# Altium PCB Ticket_Dispancer.PcbDoc (part 3 of 5)
Units mm, origin at the board's own origin, x right, y up, seen from the top; angles counter-clockwise.
Board outline 150.11 x 200.66 mm, 2 copper layers (Top Layer, Bottom Layer); 297 components, 258 nets, 997 pads, 217 vias.
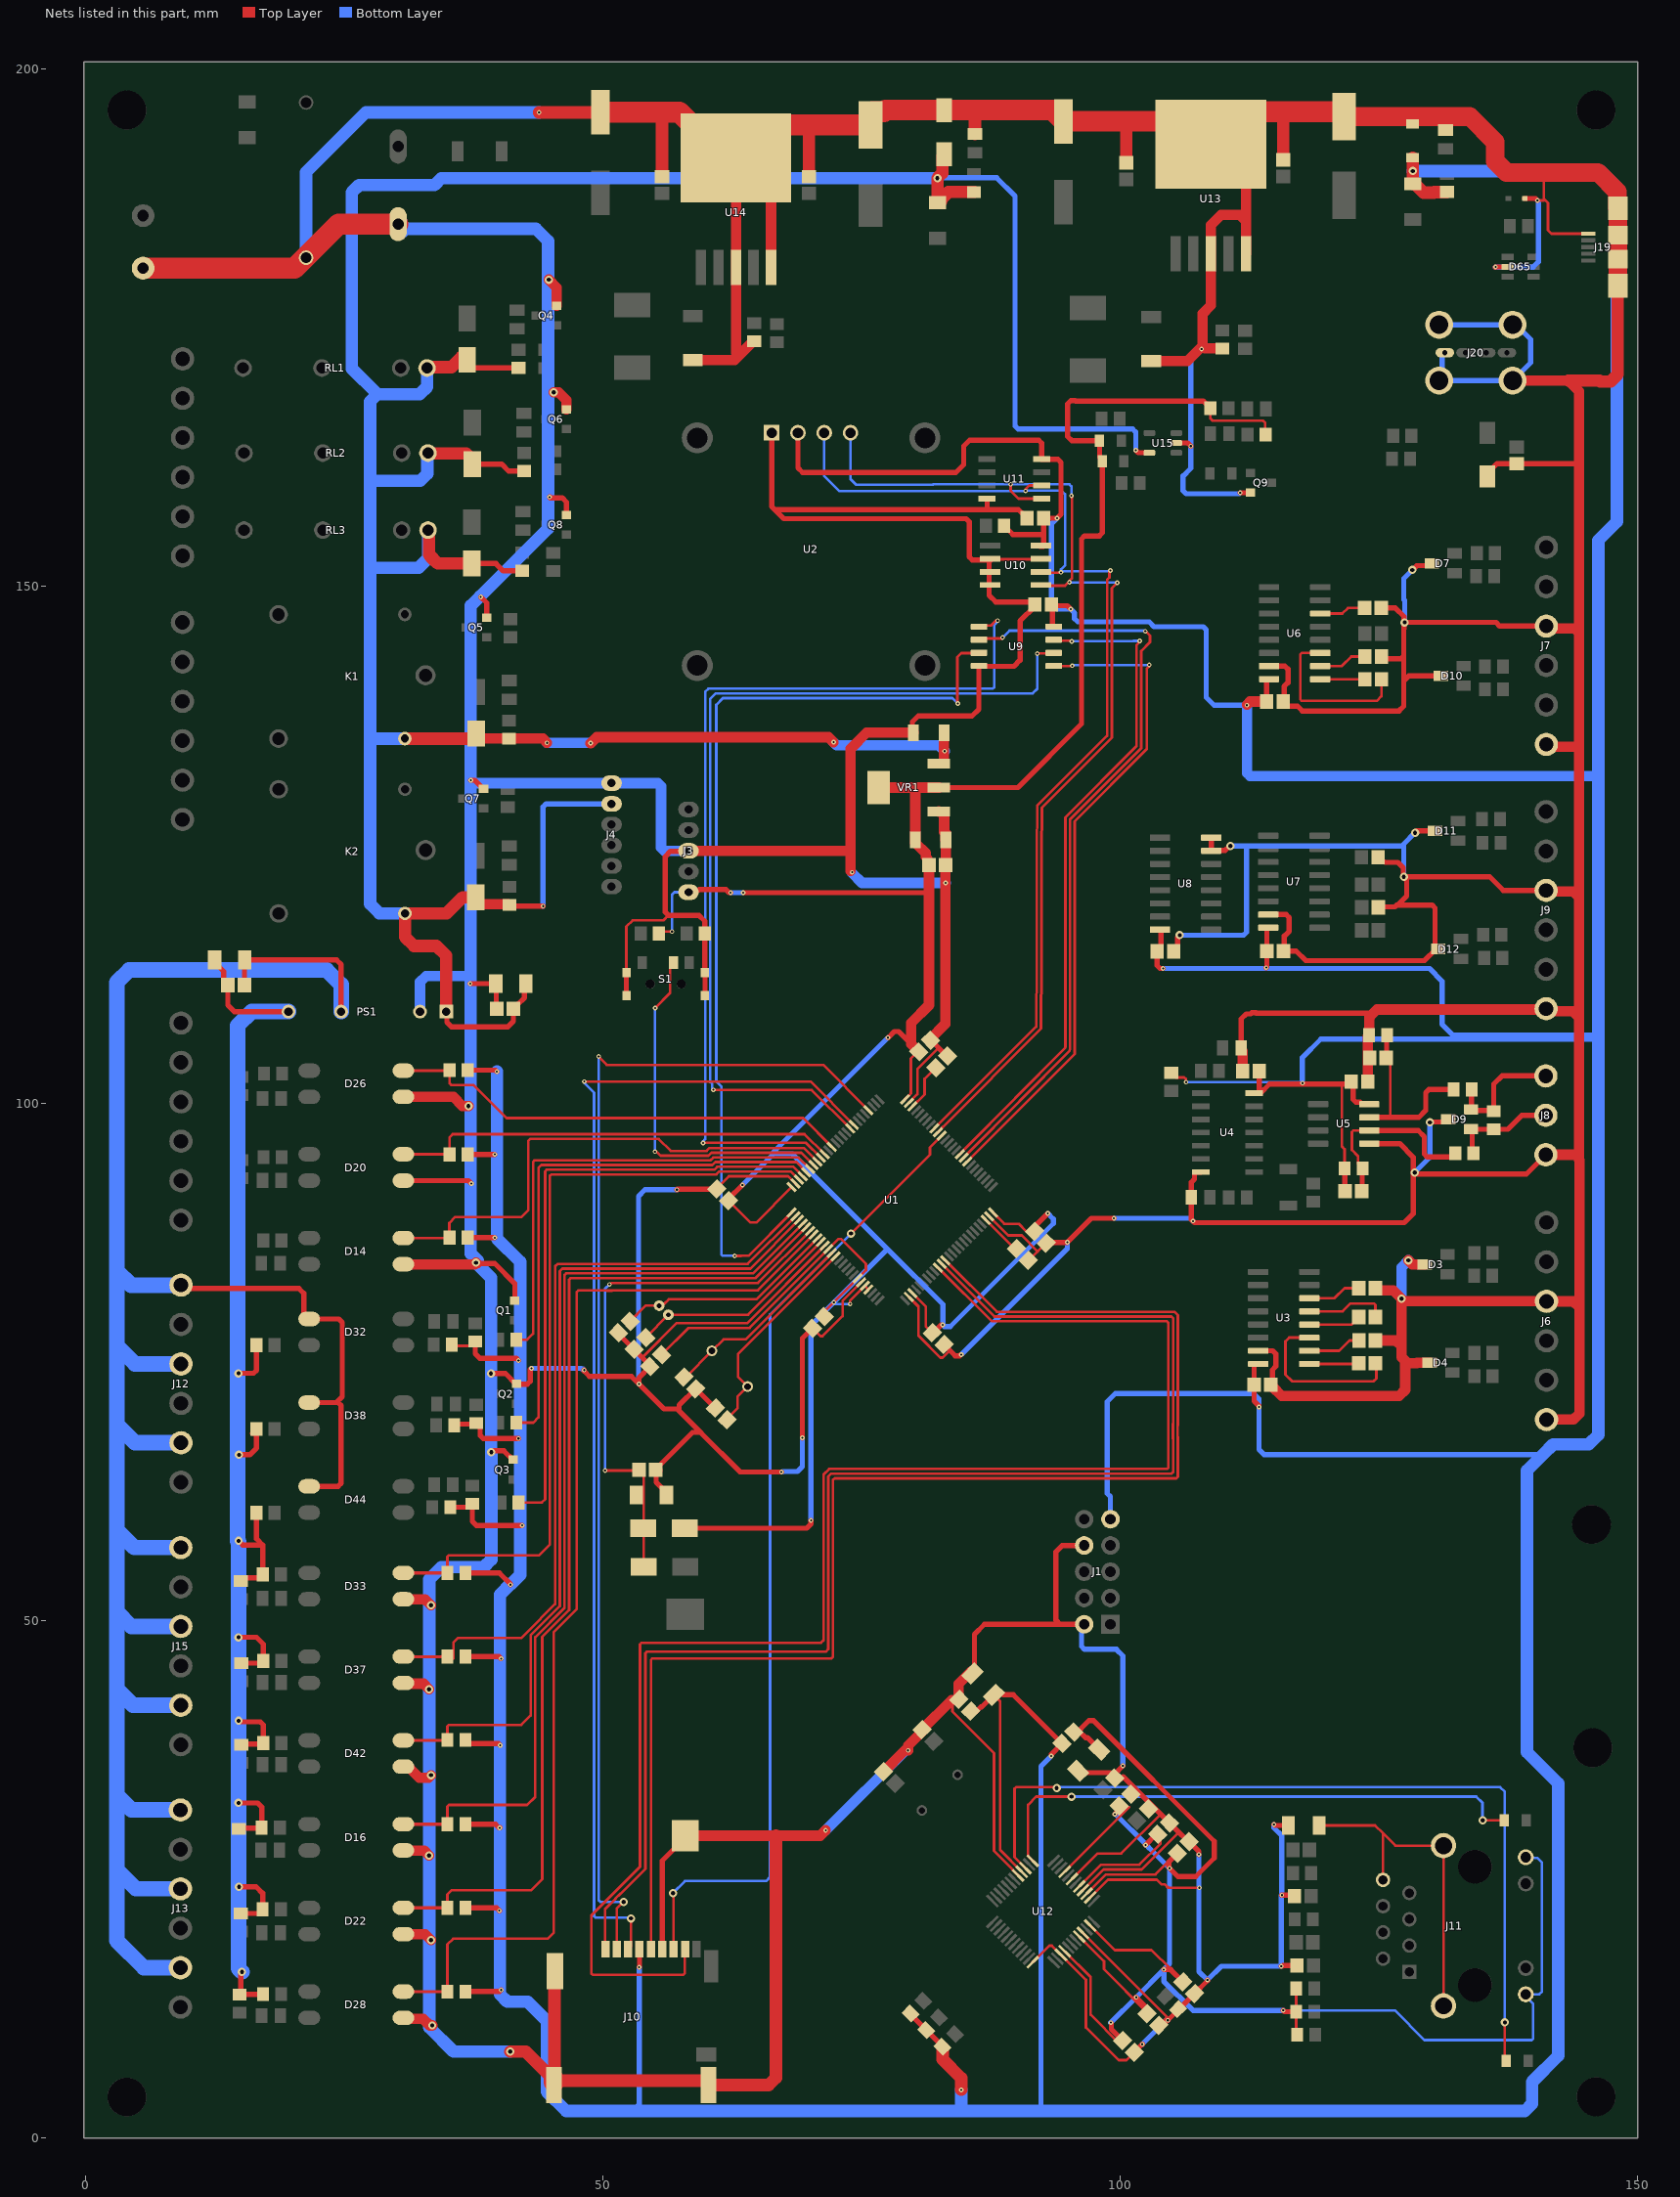
[diagram p2: the nets of this part, all layers, seen from the top]

## Part data (continued)
R93 R96: library part ERJ-PB6B3300V, "RES SMD 330 OHM 0.1% 1/4W 0805", Device Package="0805 (2012 Metric)", manufacturer="Panasonic Electronic Components", Operating Temperature="-55°C ~ 155°C", Power (Watts)="0.25W, 1/4W", Ratings=AEC-Q200, Supplier Device Package=0805, Supplier Part Number 1=P20537CT-ND, Temperature Coefficient=±50ppm/°C, Tolerance=±0.1%, componentlink1description=Datasheet, componentlink1url=https://industrial.panasonic.com/cdbs/www-data/pdf/RDM0000/AOA0000C328.pdf, componentlink2description="DigiKey Link", componentlink2url=https://www.digikey.com/en/products/detail/panasonic-electronic-components/ERJ-PB6B3300V/6213320, Composition="Thick Film", Features="Automotive AEC-Q200, Pulse Withstanding", Height - Seated (Max)="0.028\" (0.70mm)", lastupdated="08-02-2024 9.02.05 PM", Lifecycle Status=Active, Minimum Order=1, Number of Terminations=2, Package / Case="0805 (2012 Metric)", packaging=TapeAndReel, Part Number=ERJ-PB6B3300V, Part Status=Active, partid=35583, price=0.04, Resistance="330 Ohms", series=ERJ-PB6, Size / Dimension="0.079\" L x 0.049\" W (2.00mm x 1.25mm)", Supplier 1=DigiKey
R94: library part KTR10EZPF1651, "RES SMD 1.65K OHM 1% 1/8W 0805", Device Package="0805 (2012 Metric)", manufacturer="Rohm Semiconductor", Operating Temperature="-55°C ~ 155°C", Power (Watts)="0.125W, 1/8W", Ratings=AEC-Q200, Supplier Device Package=0805, Supplier Part Number 1=RHM1.65KAHCT-ND, Temperature Coefficient=±100ppm/°C, Tolerance=±1%, componentlink1description=Datasheet, componentlink1url=https://www.rohm.com/datasheet/KTR03EZPF/ktr-e, componentlink2description="DigiKey Link", componentlink2url=https://www.digikey.com/en/products/detail/rohm-semiconductor/KTR10EZPF1651/4051813, Composition="Thick Film", Features="Automotive AEC-Q200, High Voltage", Height - Seated (Max)="0.026\" (0.65mm)", lastupdated="08-02-2024 9.02.33 PM", Lifecycle Status=Active, Minimum Order=1, Number of Terminations=2, Package / Case="0805 (2012 Metric)", packaging=TapeAndReel, Part Number=KTR10EZPF1651, Part Status=Active, partid=29062, price=0.02, Resistance="1.65 kOhms", series=KTR, Size / Dimension="0.079\" L x 0.049\" W (2.00mm x 1.25mm)", Supplier 1=DigiKey
R97: library part CRCW08053K16FKEA, "RES SMD 3.16K OHM 1% 1/8W 0805", Device Package="0805 (2012 Metric)", manufacturer="Vishay Dale", Operating Temperature="-55°C ~ 155°C", Power (Watts)="0.125W, 1/8W", Ratings=AEC-Q200, Supplier Device Package=0805, Supplier Part Number 1=541-3.16KCCT-ND, Temperature Coefficient=±100ppm/°C, Tolerance=±1%, componentlink1description=Datasheet, componentlink1url=http://www.vishay.com/docs/20035/dcrcwe3.pdf, componentlink2description="DigiKey Link", componentlink2url=https://www.digikey.com/en/products/detail/vishay-dale/CRCW08053K16FKEA/1175692, Composition="Thick Film", Features="Automotive AEC-Q200", Height - Seated (Max)="0.020\" (0.50mm)", lastupdated="08-02-2024 9.02.17 PM", Lifecycle Status=Active, Minimum Order=1, Number of Terminations=2, Package / Case="0805 (2012 Metric)", packaging=TapeAndReel, Part Number=CRCW08053K16FKEA, Part Status=Active, partid=32701, price=0.01, Resistance="3.16 kOhms", series=CRCW, Size / Dimension="0.079\" L x 0.049\" W (2.00mm x 1.25mm)", Supplier 1=DigiKey
R99: library part RNCF0805DTE680R, "RES SMD 680 OHM 0.5% 1/4W 0805", Device Package="0805 (2012 Metric)", manufacturer="Stackpole Electronics Inc", Operating Temperature="-55°C ~ 155°C", Power (Watts)="0.25W, 1/4W", Ratings=AEC-Q200, Supplier Device Package=0805, Supplier Part Number 1=738-RNCF0805DTE680RCT-ND, Temperature Coefficient=±25ppm/°C, Tolerance=±0.5%, componentlink1description=Datasheet, componentlink1url=https://www.seielect.com/catalog/sei-rncf.pdf, componentlink2description="DigiKey Link", componentlink2url=https://www.digikey.com/en/products/detail/stackpole-electronics-inc/RNCF0805DTE680R/6241785, Composition="Thin Film", Features="Automotive AEC-Q200", Height - Seated (Max)="0.026\" (0.65mm)", lastupdated="30-03-2026 8.13.21 PM", Lifecycle Status=Active, Minimum Order=1, Number of Terminations=2, Package / Case="0805 (2012 Metric)", packaging=TapeAndReel, Part Number=RNCF0805DTE680R, Part Status=Active, partid=28010, price=0.01, Resistance="680 Ohms", series=RNCF, Size / Dimension="0.079\" L x 0.049\" W (2.00mm x 1.25mm)", Supplier 1=DigiKey
R100: library part RT0805DRD0710KL, "RES SMD 10K OHM 0.5% 1/8W 0805", Device Package="0805 (2012 Metric)", manufacturer=Yageo, Operating Temperature="-55°C ~ 155°C", Power (Watts)="0.125W, 1/8W", Supplier Device Package=0805, Supplier Part Number 1=311-2699-1-ND, Temperature Coefficient=±25ppm/°C, Tolerance=±0.5%, componentlink1description=Datasheet, componentlink1url=https://www.yageo.com/upload/media/product/productsearch/datasheet/rchip/PYu-RT_1-to-0.01_RoHS_L_11.pdf, componentlink2description="DigiKey Link", componentlink2url=https://www.digikey.com/en/products/detail/yageo/RT0805DRD0710KL/1077814, Composition="Thin Film", Height - Seated (Max)="0.024\" (0.60mm)", lastupdated="30-03-2026 9.20.29 PM", Lifecycle Status=Active, Minimum Order=1, Number of Terminations=2, Package / Case="0805 (2012 Metric)", packaging=TapeAndReel, Part Number=RT0805DRD0710KL, Part Status=Active, partid=27797, price=0.02, Resistance="10 kOhms", series=RT, Size / Dimension="0.079\" L x 0.049\" W (2.00mm x 1.25mm)", Supplier 1=DigiKey
R101 R108: library part RT0805DRD0747KL, "RES SMD 47K OHM 0.5% 1/8W 0805", Device Package="0805 (2012 Metric)", manufacturer=Yageo, Operating Temperature="-55°C ~ 155°C", Power (Watts)="0.125W, 1/8W", Supplier Device Package=0805, Supplier Part Number 1=311-2747-1-ND, Temperature Coefficient=±25ppm/°C, Tolerance=±0.5%, componentlink1description=Datasheet, componentlink1url=https://www.yageo.com/upload/media/product/productsearch/datasheet/rchip/PYu-RT_1-to-0.01_RoHS_L_11.pdf, componentlink2description="DigiKey Link", componentlink2url=https://www.digikey.com/en/products/detail/yageo/RT0805DRD0747KL/1078180, Composition="Thin Film", Height - Seated (Max)="0.024\" (0.60mm)", lastupdated="30-03-2026 9.20.29 PM", Lifecycle Status=Active, Minimum Order=1, Number of Terminations=2, Package / Case="0805 (2012 Metric)", packaging=TapeAndReel, Part Number=RT0805DRD0747KL, Part Status=Active, partid=27804, price=0.02, Resistance="47 kOhms", series=RT, Size / Dimension="0.079\" L x 0.049\" W (2.00mm x 1.25mm)", Supplier 1=DigiKey
R102 R103 R106: library part CSR0805FK1R00, "RES 1 OHM 1% 1/4W 0805", Device Package="0805 (2012 Metric)", manufacturer="Stackpole Electronics Inc", Operating Temperature="-55°C ~ 155°C", Power (Watts)="0.25W, 1/4W", Supplier Device Package=0805, Supplier Part Number 1=CSR0805FK1R00CT-ND, Temperature Coefficient=±200ppm/°C, Tolerance=±1%, componentlink1description=Datasheet, componentlink1url=https://www.seielect.com/catalog/sei-csr_csrn.pdf, componentlink2description="DigiKey Link", componentlink2url=https://www.digikey.com/en/products/detail/stackpole-electronics-inc/CSR0805FK1R00/2217466, Composition="Thick Film", Features="Current Sense", Height - Seated (Max)="0.026\" (0.65mm)", lastupdated="30-03-2026 8.13.19 PM", Lifecycle Status=Active, Minimum Order=1, Number of Terminations=2, Package / Case="0805 (2012 Metric)", packaging=TapeAndReel, Part Number=CSR0805FK1R00, Part Status=Active, partid=28379, price=0.03, Resistance="1 Ohms", series=CSR, Size / Dimension="0.079\" L x 0.049\" W (2.00mm x 1.25mm)", Supplier 1=DigiKey
R104 R105: library part CRGH0805J22R, "RES 22 OHM 5% 1/3W 0805", Device Package="0805 (2012 Metric)", manufacturer="TE Connectivity Passive Product", Operating Temperature="-55°C ~ 155°C", Power (Watts)="0.333W, 1/3W", Ratings=AEC-Q200, Supplier Device Package=0805, Supplier Part Number 1=A126437CT-ND, Temperature Coefficient=±100ppm/°C, Tolerance=±5%, componentlink1description=Datasheet, componentlink1url=https://www.te.com/commerce/DocumentDelivery/DDEController?Action=srchrtrv&DocNm=1773204-1&DocType=DS&DocLang=English, componentlink2description="DigiKey Link", componentlink2url=https://www.digikey.com/en/products/detail/te-connectivity-passive-product/CRGH0805J22R/2385484, Composition="Thick Film", Features="Automotive AEC-Q200", lastupdated="30-03-2026 8.13.21 PM", Lifecycle Status=Active, Minimum Order=1, Number of Terminations=2, Package / Case="0805 (2012 Metric)", packaging=TapeAndReel, Part Number=CRGH0805J22R, Part Status=Active, partid=28124, price=0.01, Resistance="22 Ohms", series="CRGH, Neohm", Size / Dimension="0.079\" L x 0.049\" W (2.00mm x 1.25mm)", Supplier 1=DigiKey
RL1 RL2 RL3: "RELAY GEN PURPOSE SPST 5A 5V", Coil Current="22 mA", Coil Voltage=5VDC, Contact Rating (Current)="5 A", manufacturer="Omron Electronics Inc-EMC Div", Must Operate Voltage="3.5 VDC", Must Release Voltage="0.25 VDC", Operating Temperature="-40°C ~ 90°C", Seal Rating="Sealed - Fully", Supplier Part Number 1=Z5439-ND, Switching Voltage="277VAC, 125VDC - Max", Coil Insulation="Class B", Coil Type="Non Latching", componentlink1description=Datasheet, componentlink1url=https://omronfs.omron.com/en_US/ecb/products/pdf/en-g6dn.pdf, componentlink2description="DigiKey Link", componentlink2url=https://www.digikey.com/en/products/detail/omron-electronics-inc-emc-div/G6DN-1A-DC5/5864613, Contact Form="SPST-NO (1 Form A)", Contact Material="Silver Alloy", lastupdated="16-08-2023 4.45.25 PM", Lifecycle Status=Active, Minimum Order=1, Mounting Type="Through Hole", Operate Time="10 ms", packaging=Tube, Part Number="G6DN-1A DC5", Part Status=Active, price=1.26, Relay Type="General Purpose", Release Time="5 ms", series=G6DN, Supplier 1=DigiKey, Termination Style="PC Pin"
RV1: "470 V 4.5 kA Varistor 1 Circuit Through Hole Disc 14mm", Package="Disc-14 Bourns", Availability="In Stock", Check_prices=https://www.snapeda.com/parts/MOV-14D471K/Bourns/view-part/?ref=eda, MF=Bourns, MP=MOV-14D471K, price=None, Purchase-URL=https://pricing.snapeda.com/search/part/MOV-14D471K/?ref=eda, SnapEDA_Link=https://www.snapeda.com/parts/MOV-14D471K/Bourns/view-part/?ref=snap
U1: "ARMÂ® CortexÂ®-M4 STM32F4 Microcontroller IC 32-Bit Single-Core 180MHz 512KB (512K x 8) FLASH 100-LQFP (14x14)", Package="LQFP-100 STMicroelectronics", Check_prices=https://www.snapeda.com/parts/STM32F446VET6/STMicroelectronics/view-part/?ref=eda, MF=STMicroelectronics, MP=STM32F446VET6, SnapEDA_Link=https://www.snapeda.com/parts/STM32F446VET6/STMicroelectronics/view-part/?ref=snap
U2: "0.96â€ 128 X 64 MONOCHROME GRAPHIC OLED DISPLAY MODULE - I2C", Package=Package, Check_prices=https://www.snapeda.com/parts/DM-OLED096-636/Display+Module/view-part/?ref=eda, MF="Display Module", MP=DM-OLED096-636, SnapEDA_Link=https://www.snapeda.com/parts/DM-OLED096-636/Display+Module/view-part/?ref=snap
U3 U6 U7: "Dual Transmitter/Receiver RS-232 16-Pin SOIC N T/R", Package="SOIC-16 Maxim Integrated", Check_prices=https://www.snapeda.com/parts/MAX3232ESE+T/Analog+Devices/view-part/?ref=eda, MF="Analog Devices", MP=MAX3232ESE+T, SnapEDA_Link=https://www.snapeda.com/parts/MAX3232ESE+T/Analog+Devices/view-part/?ref=snap
U4: "Inverter IC 6 Channel Schmitt Trigger 14-SOIC", Package="SO14-14 Nexperia USA Inc.", Check_prices=https://www.snapeda.com/parts/74HC14D/Toshiba/view-part/?ref=eda, MF=Toshiba, MP=74HC14D, SnapEDA_Link=https://www.snapeda.com/parts/74HC14D/Toshiba/view-part/?ref=snap
U5: "3.3V Powered, Â±15kV ESD-Protected, 12Mbps, Slew-Rate-Limited True RS-485/RS-422 Transceivers", Package="SOIC-8 Maxim", Check_prices=https://www.snapeda.com/parts/MAX3485EESA+/Analog+Devices/view-part/?ref=eda, MF="Analog Devices", MP=MAX3485EESA+, SnapEDA_Link=https://www.snapeda.com/parts/MAX3485EESA+/Analog+Devices/view-part/?ref=snap
U8: "20-V, 4:1, 2-channel general-purpose multiplexer", Package="SOIC-16 Texas Instruments", Check_prices=https://www.snapeda.com/parts/CD4052BMT/Texas+Instruments/view-part/?ref=eda, MF="Texas Instruments", MP=CD4052BMT, SnapEDA_Link=https://www.snapeda.com/parts/CD4052BMT/Texas+Instruments/view-part/?ref=snap
U9: "FLASH - NOR Memory IC 128Mb (16M x 8) SPI - Quad I/O, QPI, DTR 133 MHz 8-SOIC", Package="SOIC-8 Winbond Electronics", Check_prices=https://www.snapeda.com/parts/W25Q128JVSIQ/Winbond/view-part/?ref=eda, MF="Winbond Electronics", MP=W25Q128JVSIQ, SnapEDA_Link=https://www.snapeda.com/parts/W25Q128JVSIQ/Winbond/view-part/?ref=snap
U10: "EEPROM Memory IC 512Kb (64K x 8) IÂ²C 400 kHz 900 ns 8-SOIC", Package="SO-8 Microchip", Check_prices=https://www.snapeda.com/parts/AT24C512C-SSHM-T/Microchip/view-part/?ref=eda, MF=Microchip, MP=AT24C512C-SSHM-T, SnapEDA_Link=https://www.snapeda.com/parts/AT24C512C-SSHM-T/Microchip/view-part/?ref=snap
U11: "Microchip 24AA02E48-I/SN Serial EEPROM Memory,2kb,3500ns,1.7 to 5.5V 8-Pin SOIC", Package="SO-8 Microchip", Check_prices=https://www.snapeda.com/parts/24AA02E48-I/SN/Microchip/view-part/?ref=eda, MF=Microchip, MP=24AA02E48-I/SN, SnapEDA_Link=https://www.snapeda.com/parts/24AA02E48-I/SN/Microchip/view-part/?ref=snap
U12: "Hardwired TCP/IP embedded Ethernet controller", Package=None, Availability=Unavailable, MP=W5500, price=None
U13 U14: "SIMPLE SWITCHERÂ® 4V to 60V, 3A Low Component Count Step-Down Regulator", Package="TO-263-5 Texas Instruments", Check_prices=https://www.snapeda.com/parts/LM2576HVSX-5.0/NOPB/Texas+Instruments/view-part/?ref=eda, MF="Texas Instruments", MP=LM2576HVSX-5.0/NOPB, SnapEDA_Link=https://www.snapeda.com/parts/LM2576HVSX-5.0/NOPB/Texas+Instruments/view-part/?ref=snap
U15: "Power Switch/Driver 1:1 N-Channel 500mA SOT-23-5", Package="SOT-23 STMicroelectronics", Check_prices=https://www.snapeda.com/parts/STMPS2141STR/STMicroelectronics/view-part/?ref=eda, Digi-Key_Part_Number=497-6933-2-ND, MF=STMicroelectronics, MP=STMPS2141STR, Purchase-URL=https://pricing.snapeda.com/search/part/STMPS2141STR/?ref=eda, SnapEDA_Link=https://www.snapeda.com/parts/STMPS2141STR/STMicroelectronics/view-part/?ref=snap
VR1: "800-mA 15-V linear voltage regulator", Package="SOT-223-4 Texas Instruments", Check_prices=https://www.snapeda.com/parts/LM1117IMP-3.3/NOPB/Texas+Instruments/view-part/?ref=eda, MF="Texas Instruments", MP=LM1117IMP-3.3/NOPB, SnapEDA_Link=https://www.snapeda.com/parts/LM1117IMP-3.3/NOPB/Texas+Instruments/view-part/?ref=snap
Y1 Y3: "Crystals 17.1776MHz HC49S", Package="HC-49US ECS Inc.", Check_prices=https://www.snapeda.com/parts/ECS-17.1776-20-4/ECS/view-part/?ref=eda, MF="ECS International", MP=ECS-17.1776-20-4, SnapEDA_Link=https://www.snapeda.com/parts/ECS-17.1776-20-4/ECS/view-part/?ref=snap
Y2: "32.768kHz Â±10ppm Crystal 6pF 35 kOhms Cylindrical Can, Radial", Package="Cylindrical Can Radial  Citizen Finetech Miyota", Availability=Warning, Check_prices=https://www.snapeda.com/parts/CFS-20632768EZBB/Citizen%20Finedevice%20Co%20Ltd/view-part/2815870/?ref=eda, MF="Citizen Finedevice", MP=CFS-20632768EZBB, price=None, Purchase-URL=https://pricing.snapeda.com/search/part/CFS-20632768EZBB/?ref=eda, SnapEDA_Link=https://www.snapeda.com/parts/CFS-20632768EZBB/Citizen%20Finedevice%20Co%20Ltd/view-part/2815870/?ref=snap

## Via types
v1: diameter 0.45, hole 0.2, Top Layer to Bottom Layer, 169 vias
v2: diameter 0.8, hole 0.4, Top Layer to Bottom Layer, 48 vias

## Nets (pads, with @x,y where several pads share a name; then routed paths per layer and width w, separated by ;. In a path a pad name is that pad's centre, name@x,y a point inside that pad or via, vN(x,y) a via of type N, cw(c..) or ccw(c..) an arc to the next point about the centre after c; other vN are vias at no path point)
3v3: C17.2 C22.2 C23.2 C24.2 C25.2 C31.1 C32.2 C37.2 C38.2 C39.2 C40.2 D57.1 F2.2 FB1.1 J1.9 J10.4 R8.2 R13.2 R27.1 R28.1 R29.1 R35.1 R36.2 R39.2 R44.2 R47.2 R52.2 R55.2 R60.2 R63.1 R65.1 R67.2 R72.1 R74.2 R75.1 R80.1 R81.1 R93.1 U2.2 U3.16 U4.14 U5.8 U6.16 U7.16 U8.16 U9.8 U10.8 U11.8 U12.28 | length 890.4
  Top Layer w0.254: R63.1@35.52,76.87 35.831,76.559 37.68,76.559 R65.1@37.921,76.559 ; C39.2@87.785,42.845 87.785,42.82 88.397,42.208 88.397,27.831 U12.28@90.488,25.74 ; R8.2@104.94,102.955 105.388,102.507 106.191,102.507 106.34,102.358 106.34,102.08 v1(106.36,102.06) ; 121.43,101.87 121.43,95.818 121.68,95.568 R13.2@121.68,93.72
  Top Layer w0.5: R72.1@35.651,68.885 35.766,69 37.94,69 38.15,68.79 38.15,67.903 38.443,67.61 v1(41.86,67.61) ; R80.1@35.776,60.97 37.357,60.97 R81.1@37.389,61.002 ; R55.2@36.73,14.16 40.02,14.16 v1(40.18,14.32) ; R47.2@36.73,22.252 39.738,22.252 v1(40.01,21.98) ; R39.2@36.73,30.331 39.629,30.331 39.97,29.99 v1(40.05,29.99) ; R74.2@36.73,38.48 36.73,38.46 37.055,38.135 39.915,38.135 v1(40.08,37.97) ; R67.2@36.73,46.548 39.962,46.548 v1(40.17,46.34) ; R60.2@36.73,54.61 40.02,54.61 41.07,53.56 v1(41.07,53.48) ; R36.2@36.95,87.02 v1(39.56,87.02) ; R44.2@36.95,95.05 39.54,95.05 v1(39.56,95.07) ; R52.2@36.95,103.22 39.63,103.22 v1(39.77,103.08) ; R81.1@37.06,61.33 37.717,61.33 37.538,61.151 R81.1@37.389,61.002 ; R81.1@37.389,61.3 R81.1@37.389,61.002 ; R65.1@37.68,76.99 37.68,76.559 37.68,75.81 38.12,75.37 41.63,75.37 v1(41.86,75.14) ; v1(42.22,59.21) 37.79,59.21 37.389,59.611 R81.1@37.389,61.002 ; v1(53.52,16.52) 53.55,16.55 J10.4@53.55,18.27 ; U2.2@68.86,164.82 68.86,161.42 69.31,160.97 84.12,160.97 84.88,161.73 84.88,163.53 85.44,164.09 92.129,164.09 92.422,163.797 U11.8@92.422,162.259 93.971,162.259 94.28,161.95 94.28,156.93 v1(93.9,156.55) 93.891,156.559 C37.2@92.6,156.559 92.6,155.19 ; R29.1@79.738,12.034 79.738,11.964 82.811,8.891 R27.1@82.811,8.821 ; C40.2@85.52,41.22 86.086,41.22 86.539,41.673 86.624,41.673 C39.2@87.38,42.429 ; C39.2@87.785,42.845 87.962,43.021 88.528,43.021 88.705,42.845 89.675,42.845 FB1.1@94.39,38.13 93.34,37.08 v1(93.34,36.92) ; R35.1@88.78,155.83 88.78,155.73 89.105,155.405 89.205,155.405 89.64,154.97 92.38,154.97 92.6,155.19 ; U10.8@92.254,153.85 92.571,153.85 92.6,153.88 92.6,155.19 ; U9.8@93.545,146.052 93.492,146.052 93.452,146.092 93.452,148.003 93.36,148.095 94.89,148.095 v1(95.219,147.767) ; C31.1@103.56,114.69 103.56,113.323 103.853,113.031 v1(104.139,113.031) ; U8.16@103.85,116.79 103.88,116.79 103.93,116.74 C31.1@103.93,114.73 ; U4.14@112.964,100.987 U4.14@113.423,100.987 ; U3.16@113.33,74.819 112.985,74.819 112.94,74.774 C17.2@112.94,72.8 112.94,71.24 113.41,70.77 v1(113.41,70.67) ; C22.2@113.44,103.13 113.44,101.004 U4.14@113.423,100.987 ; v1(114.11,113.12) 114.17,113.18 C32.2@114.17,114.72 114.17,116.935 114.215,116.98 U7.16@114.31,116.98 ; C25.2@114.15,138.84 114.15,140.95 114.195,140.995 U6.16@114.385,140.995 ; R13.2@121.68,93.72 121.705,93.695 121.705,91.541 C24.2@121.73,91.516 ; U5.8@124.075,99.921 123.385,99.921 123.196,100.11 122.793,100.11 122.5,100.403 122.5,101.94 C23.2@122.33,102.11 122.09,101.87 121.43,101.87 114.431,101.87 113.548,100.987 U4.14@113.423,100.987
  Top Layer w1: v1@112.25,138.547 112.543,138.84 C25.2@114.15,138.84
  Top Layer w1.2: R27.1@82.847,8.751 82.847,7.603 84.65,5.8 v1(84.65,4.664) ; D57.1@128.27,191.405 v2(128.27,190.11) F2.2@128.27,188.87 128.47,188.87 129.32,188.02 130.314,188.02 130.356,188.062 131.547,188.062 R93.1@131.572,188.087
  Bottom Layer w0.254: v1(106.36,102.06) 117.51,102.06 v1(117.61,101.96)
  Bottom Layer w0.5: 52.89,2.63 53.52,3.26 v1(53.52,16.52) ; 92.34,2.63 92.34,35.92 v1(93.34,36.92) ; v1(93.9,156.55) 93.35,156 93.35,148.31 93.893,147.767 v1(95.219,147.767) 95.59,147.395 95.59,146.85 95.91,146.53 102.804,146.53 103.274,146.06 108.027,146.06 108.32,145.767 108.32,139.24 109.08,138.48 v1(112.25,138.48) ; J1.9@99.06,59.817 99.06,62 98.75,62.31 98.75,71.17 99.54,71.96 112.88,71.96 113.41,71.43 v1(113.41,70.67) 113.41,66.54 113.885,66.065 140.855,66.065 ; v1(104.139,113.031) 129.89,113.031 131.1,111.82 131.1,107.65 132.17,106.58 145.83,106.58 146.2,106.21 119.39,106.21 117.61,104.43 v1(117.61,101.96) ; 112.25,131.913 112.543,131.62 ; 146.041,131.62 146.2,131.779
  Bottom Layer w1: 112.25,131.913 v1(112.25,138.48) ; 112.543,131.62 146.041,131.62
  Bottom Layer w1.2: v1(39.77,103.08) 39.77,86.94 42.02,84.69 42.02,54.43 v1(41.07,53.48) 41.01,53.48 40.07,52.54 40.07,13.883 40.773,13.18 42.74,13.18 44.6,11.32 44.6,4.49 46.46,2.63 52.89,2.63 84.506,2.63 ; v1(84.65,4.664) 84.65,2.774 84.506,2.63 ; v2(128.27,190.11) 146.42,190.11 148,188.53 148,156.22 146.2,154.42 146.2,131.779 146.2,106.21 146.2,67.97 145.27,67.04 141.83,67.04 140.855,66.065 139.31,64.52 139.31,37.305 142.34,34.275 142.34,7.96 139.81,5.43 139.81,3.333 139.107,2.63 92.34,2.63 84.506,2.63
5v: C57.2 C58.2 C70.2 D47.2 D49.2 D51.2 D53.2 D55.2 D60.C F3.2 J4.5 K1.COIL1 K2.COIL1 PS1.1 R83.2 R84.2 R86.2 R88.2 R90.2 R96.1 RL1.1 RL2.1 RL3.1 U15.5 VR1.3 | length 357.5
  Top Layer w0.5: 33.112,152.578 33.512,152.178 34.06,152.178 ; PS1.1@34.876,108.87 34.93,108.816 34.93,107.84 35.37,107.4 40.83,107.4 41.36,107.93 41.36,109.2 41.76,109.6 41.81,109.6 42.432,110.222 42.432,111.446 C58.2@42.565,111.579 ; 35.98,119.92 36.46,119.92 ; D47.2@36.621,172.14 D47.2@36.898,171.863 36.898,171.69 37.498,171.09 R83.2@41.86,171.09 ; D55.2@37.338,152.178 39.675,152.178 40.383,151.47 R90.2@42.22,151.47 ; D51.2@37.4,162.19 D51.2@37.4,161.79 40.23,161.79 40.905,161.115 R86.2@42.41,161.115 ; R88.2@40.99,119.175 41.105,119.06 v1(44.23,119.06) ; VR1.3@82.468,132.825 82.75,132.825 VR1.3@82.975,133.05 ; v1(101.5,163.13) 101.75,162.88 U15.5@102.84,162.88
  Top Layer w1: D53.2@37.719,119.92 37.719,119.6 38.069,119.25 R88.2@40.815,119.25 ; D49.2@37.772,135.763 38.28,135.255 R84.2@40.947,135.255 44.205,135.255 v1(44.61,134.85) ; v1(48.83,134.81) 49.41,135.39 71.82,135.39 v1(72.3,134.91) ; VR1.3@82.975,133.05 C70.2@82.975,135.83
  Top Layer w1.2: K1.COIL1@30.872,135.255 37.264,135.255 D49.2@37.472,135.463 ; RL1.1@33.02,171.069 33.116,171.165 35.385,171.165 D47.2@36.36,172.14 ; RL3.1@33.112,155.408 33.207,155.312 33.207,153.031 34.06,152.178 D55.2@37.338,152.178 ; RL2.1@33.147,162.814 36.776,162.814 D51.2@37.4,162.19 ; PS1.1@34.876,108.87 34.876,114.261 33.917,115.22 31.76,115.22 30.901,116.079 30.901,118.339 K2.COIL1@30.88,118.36 34.9,118.36 36.46,119.92 D53.2@37.719,119.92 ; D60.C@82.99,191.72 82.815,191.545 82.815,189.9 v2(82.338,189.423) F3.2@82.338,187.058 82.538,187.058 82.702,187.222 82.702,187.377 83.405,188.08 R96.1@85.88,188.08
  Bottom Layer w0.5: v1(44.23,119.06) 44.23,128.657 44.523,128.95 J4.5@50.85,128.95 ; v1@48.79,134.85 v1(48.83,134.81) ; v2(82.338,189.423) 82.375,189.46 88.06,189.46 89.84,187.68 89.84,165.473 90.133,165.18 101.207,165.18 101.5,164.887 v1(101.5,163.13)
  Bottom Layer w1: v1(44.61,134.85) v1@48.79,134.85 ; v1(72.3,134.91) 72.62,134.59 82.49,134.59 v1(83.04,134.04)
  Bottom Layer w1.2: K1.COIL1@30.872,135.255 27.625,135.255 27.52,135.15 ; K2.COIL1@30.88,118.36 30.876,118.364 28.426,118.364 27.52,119.27 27.52,135.15 ; RL1.1@33.02,171.069 33.02,169.243 32.317,168.54 28.223,168.54 ; RL3.1@33.112,155.408 33.112,152.662 32.22,151.77 27.52,151.77 ; RL2.1@33.147,162.814 33.051,162.718 33.051,160.863 32.348,160.16 27.67,160.16 27.52,160.31 ; v2(82.338,189.423) 34.403,189.423 33.74,188.76 26.453,188.76 25.75,188.057 25.75,171.013 28.223,168.54 ; 27.52,135.15 27.52,151.77 ; 27.52,151.77 27.52,160.31 ; 27.52,160.31 27.52,167.837 28.223,168.54
A: D9.1 J8.2 R14.2 R18.2 | length 10.2
  Top Layer w0.5: R14.2@134.134,95.171 134.012,95.293 134.012,97.378 D9.1@133.89,97.5 R18.2@136.094,97.501 ; R18.2@136.094,97.501 137.471,97.501 138.82,98.85 J8.2@141.13,98.85
A3v3: C41.2 C42.2 C43.2 C44.2 C45.2 C46.2 C47.2 FB1.2 J11.9 J11.12 R24.2 R25.2 R26.2 U12.4 U12.8 U12.11 U12.15 U12.17 U12.21 | length 190.2
  Top Layer w0.254: U12.4@94.632,18.06 U12.4@94.632,18.06 97.146,15.544 97.146,11.914 C41.2@99.95,9.11 ; U12.21@94.632,25.74 100.869,31.976 ; U12.8@96.046,19.475 98.43,17.091 98.43,16.319 102.604,12.144 C44.2@102.604,12.036 C44.2@102.604,12.546 ; U12.17@96.046,24.325 98.144,26.423 101.843,26.423 103.905,28.485 C46.2@103.905,29.089 ; U12.15@96.753,23.618 98.615,25.48 103.413,25.48 104.682,26.748 ; U12.11@97.107,20.535 99.472,18.17 103.03,18.17 104.895,16.305 ; v1(99.09,11.16) v1@99.15,11.1 ; C42.2@100.304,32.114 C42.2@100.557,32.114 ; C43.2@105.544,15.106 C43.2@106.064,15.106 ; R26.2@117.014,14.45 R24.2@117.014,12.218 117.014,10.066 R25.2@117.094,9.986
  Top Layer w0.5: FB1.2@95.521,39.261 96.087,39.261 96.646,38.702 96.819,38.702 C47.2@97.985,37.535 ; FB1.2@95.592,38.952 96.998,40.358 97.412,40.358 109.09,28.68 109.09,27.07 107.3,25.28 105.57,25.28 v1(104.77,26.08) ; v1@99.15,11.1 99.15,10.51 C41.2@100.234,9.426 ; v1(99.49,31.3) C42.2@100.304,32.114 ; v1(101.54,13.61) C44.2@102.604,12.546 ; v1(102.442,28.321) 103.463,29.342 C46.2@103.617,29.342 ; v1(104.22,16.29) 104.88,16.29 C43.2@106.064,15.106 ; v1@104.71,26.193 104.71,26.72 C45.2@105.52,27.53 ; v1(115.75,12.34) 115.872,12.218 R24.2@117.014,12.218
  Bottom Layer w0.254: v1(99.49,31.3) v1@99.55,31.3 ; v1(115.75,12.34) 126.53,12.34 129.39,9.48 139.761,9.48 139.91,9.629 139.91,12.99 139.192,13.708 J11.9@139.192,13.893 140.493,13.893 140.76,14.16 140.76,26.64 140.338,27.062 139.273,27.062 J11.12@139.192,27.143
  Bottom Layer w0.5: v1(99.09,11.16) v1(101.54,13.61) v1(104.22,16.29) ; v1@99.55,31.3 102.485,28.365 102.73,28.12 102.73,28.06 102.79,28.06 v1(104.77,26.08) 104.77,16.84 v1(104.22,16.29) ; v1(115.75,12.34) 107.04,12.34 104.22,15.16 v1(104.22,16.29)
AA: C24.1 R13.1 R14.1 U5.6 | length 18.4
  Top Layer w0.254: R13.1@123.43,93.72 122.982,94.168 122.982,94.908 122.389,95.5 122.389,97.232 122.538,97.381 U5.6@124.075,97.381
  Top Layer w0.5: C24.1@123.33,91.516 123.38,91.566 123.38,93.67 R13.1@123.43,93.72 ; U5.6@124.075,97.381 128.799,97.381 129.39,96.79 129.39,95.113 129.683,94.82 132.059,94.82 132.384,95.145 R14.1@132.384,95.171
ACTLED: R33.1 U12.27 | length 81.9
  Top Layer w0.254: U12.27@90.842,26.093 89.798,27.137 89.798,33.771 89.947,33.92 93.77,33.92 v2(93.86,33.83) ; v2(137.17,11.18) 137.17,7.6 R33.1@137.31,7.46
  Bottom Layer w0.254: v2(93.86,33.83) 93.95,33.92 136.722,33.92 137.17,33.472 v2(137.17,11.18)
B: D9.2 J8.1 R18.1 R19.2 | length 12.2
  Top Layer w0.5: R19.2@133.974,101.341 133.932,101.299 133.932,99.442 D9.2@133.89,99.4 133.965,99.325 136.02,99.325 R18.1@136.094,99.251 136.094,101.864 136.89,102.66 J8.1@141.13,102.66
BB: C26.1 R16.1 R19.1 U5.7 | length 18.7
  Top Layer w0.254: C26.1@125.71,104.381 126.09,104.001 126.09,98.786 126.239,98.637 126.449,98.637 126.463,98.651
  Top Layer w0.5: U5.7@124.075,98.651 126.463,98.651 128.851,98.651 129.52,99.32 129.52,101.048 129.813,101.341 R19.1@132.224,101.341 ; C26.1@125.71,104.381 125.752,104.423 125.752,106.544 R16.1@125.794,106.586
BOOT: S1.2 U1.94 | length 35.1
  Top Layer w0.254: v1(55.04,95.34) 55.188,95.34 55.578,94.95 60.212,94.95 60.492,95.23 69.183,95.23 U1.94@70.377,94.037 ; v1(55.06,109.22) 56.507,110.667 56.507,113.283 S1.2@56.83,113.606
  Bottom Layer w0.254: v1(55.04,95.34) 55.05,95.35 55.05,109.21 v1(55.06,109.22)
CGND: C56.2 J11.8 J11.15 J11.16 | length 32.8
  Top Layer w0.254: C56.2@119.215,30.21 124.63,30.21 125.402,29.438 ; J11.8@125.402,24.958 125.402,29.438 ; J11.15@131.242,12.773 J11.16@131.242,28.263 126.577,28.263 125.402,29.438
CLK: J10.5 U1.37 | length 136.5
  Top Layer w0.254: J10.5@54.65,18.27 54.65,46.203 54.799,46.352 72.099,46.352 72.248,46.501 72.248,63.611 72.397,63.76 105.419,63.76 105.568,63.909 105.568,67.77 105.55,67.788 105.55,68.842 105.568,68.86 105.568,79.532 105.238,79.862 88.087,79.862 U1.37@83.105,84.844
CMD: J10.3 U1.83 | length 115.6
  Top Layer w0.254: v1(48.21,102.11) 70.082,102.11 U1.83@74.266,97.926 ; J10.3@52.45,18.27 52.723,18.543 52.723,19.957 52.73,19.964 v2(52.73,21.23)
  Bottom Layer w0.254: v1(48.21,102.11) 48.21,101.991 49.16,101.041 49.16,21.459 49.309,21.31 52.65,21.31 v2(52.73,21.23)
D0: J10.7 U1.65 | length 94.2
  Top Layer w0.254: J10.7@56.85,18.27 v2@56.85,23.914 ; v2(73.99,87.43) 81.614,95.054 81.614,95.729 U1.65@82.751,96.865
  Bottom Layer w0.254: v2(56.78,23.67) 57.95,24.84 65.781,24.84 66.17,25.229 66.17,79.61 v2(73.99,87.43)
D1: J10.8 U1.35 | length 150.9
  Top Layer w0.254: J10.8@57.92,17.99 57.92,15.919 57.771,15.77 57.53,15.77 49.169,15.77 49.049,15.77 48.9,15.919 48.9,21.52 53.6,26.22 53.6,47.717 53.749,47.866 71.079,47.866 71.34,48.127 71.34,64.136 71.872,64.668 104.511,64.668 104.66,64.817 104.66,67.394 104.642,67.412 104.642,69.218 104.66,69.236 104.66,78.76 104.466,78.954 87.581,78.954 U1.35@82.397,84.137
D2: J10.1 U1.36 | length 138
  Top Layer w0.254: J10.1@50.22,17.99 50.22,22.12 51.229,23.129 51.229,23.154 51.687,23.611 51.711,23.611 54.12,26.02 54.12,46.858 54.269,47.007 71.539,47.007 71.794,47.262 71.794,63.948 72.06,64.214 104.965,64.214 105.114,64.363 105.114,67.582 105.096,67.6 105.096,69.03 105.114,69.048 105.114,79.246 104.952,79.408 87.834,79.408 U1.36@82.751,84.491
D3: J10.2 U1.79 | length 117.1
  Top Layer w0.254: v1(49.61,104.54) 49.61,104.5 50.396,103.714 71.306,103.714 U1.79@75.68,99.34 ; J10.2@51.35,18.27 51.35,22.17 v2(52.01,22.83)
  Bottom Layer w0.254: v1(49.61,104.54) 49.614,104.536 49.614,22.979 49.763,22.83 v2(52.01,22.83)
DI1: D16.4 R39.1 U1.4 | length 91.5
  Top Layer w0.254: R39.1@34.98,30.331 34.98,32.041 35.129,32.19 42.69,32.19 43.48,32.98 43.48,48.404 46.302,51.226 46.302,83.421 46.451,83.57 64.506,83.57 U1.4@69.316,88.38
  Top Layer w0.3: D16.4@30.739,30.34 34.971,30.34 R39.1@34.98,30.331
DI2: D22.4 R47.1 U1.5 | length 99.4
  Top Layer w0.254: R47.1@34.98,22.252 34.98,23.54 35.38,23.94 43.08,23.94 44.15,25.01 44.15,48.432 46.756,51.038 46.756,82.961 46.905,83.11 64.753,83.11 U1.5@69.67,88.026
  Top Layer w0.3: D22.4@30.739,22.25 34.978,22.25 R47.1@34.98,22.252
DI3: D28.4 R55.1 U1.7 | length 107.6
  Top Layer w0.254: R55.1@34.98,14.16 34.98,18.72 35.53,19.27 44.68,19.27 45.25,19.84 45.25,48.89 47.491,51.131 47.491,81.781 47.64,81.93 50.367,81.93 50.399,81.898 50.901,81.898 50.933,81.93 64.987,81.93 U1.7@70.377,87.319
  Top Layer w0.3: D28.4@30.739,14.16 R55.1@34.98,14.16
DI4: D33.4 R60.1 U1.98 | length 76.4
  Top Layer w0.254: R60.1@34.98,54.61 34.98,56.179 35.129,56.328 43.858,56.328 44.88,57.35 44.88,92.985 45.029,93.134 56.98,93.134 60.964,93.134 61.244,93.414 68.17,93.414 U1.98@68.962,92.623
  Top Layer w0.3: D33.4@30.739,54.62 34.97,54.62 R60.1@34.98,54.61
DI5: D37.4 R67.1 U1.2 | length 75
  Top Layer w0.254: R67.1@35.298,46.116 35.564,46.382 35.564,47.9 35.988,48.324 42.116,48.324 42.63,48.838 45.394,51.602 45.394,84.241 45.642,84.489 64.011,84.489 U1.2@68.609,89.087
  Top Layer w0.3: D37.4@30.739,46.53 34.484,46.53 34.536,46.581 R67.1@34.633,46.581
DI6: D42.4 R74.1 U1.3 | length 83.3
  Top Layer w0.254: R74.1@34.98,38.48 34.98,39.781 35.129,39.93 42.13,39.93 43.026,40.826 43.026,48.354 43.026,48.592 45.848,51.414 45.848,83.791 46.092,84.035 64.264,84.035 U1.3@68.962,88.733
  Top Layer w0.3: D42.4@30.739,38.44 34.94,38.44 R74.1@34.98,38.48
DI7: D14.4 R36.1 U1.93 | length 50.1
  Top Layer w0.25: D14.4@30.739,86.99 R36.1@35.02,86.99
  Top Layer w0.254: R36.1@35.02,86.99 35.18,87.15 35.18,88.44 35.76,89.02 42.15,89.02 42.811,89.681 42.811,96.391 42.981,96.561 55.414,96.561 56.571,95.404 60.024,95.404 60.304,95.684 69.436,95.684 U1.93@70.94,94.181
DI8: D20.4 R44.1 U1.91 | length 43.2
  Top Layer w0.25: D20.4@30.739,95.08 35.17,95.08 R44.1@35.2,95.05
  Top Layer w0.254: R44.1@35.2,95.05 35.2,96.721 35.494,97.015 69.495,97.015 U1.91@71.396,95.114
DI9: D26.4 R52.1 U1.89 | length 45.3
  Top Layer w0.25: D26.4@30.739,103.17 35.15,103.17 R52.1@35.2,103.22
  Top Layer w0.254: R52.1@35.2,103.22 35.2,101.924 35.349,101.775 37.495,101.775 40.693,98.577 69.372,98.577 U1.89@72.144,95.805
DI_GND: C59.1 C60.1 D32.3 D38.3 D44.3 J12.2 J12.4 J12.6 J13.2 J13.4 J13.6 J15.2 J15.4 J15.6 PS1.5 | length 236.6
  Top Layer w0.5: J12.6@9.24,82.44 9.57,82.11 20.64,82.11 21.108,81.642 21.108,79.586 21.524,79.17 24.48,79.17 24.82,78.83 24.82,71.66 24.24,71.08 D38.3@21.63,71.08 ; C60.1@15.37,111.44 15.382,111.452 15.382,113.858 C59.1@15.393,113.869 24.271,113.869 24.716,113.424 PS1.5@24.716,108.87 ; D44.3@21.63,62.99 24.427,62.99 24.72,63.283 24.72,70.787 24.427,71.08
  Bottom Layer w1.5: J13.2@9.19,16.47 5.66,16.47 3.03,19.1 3.03,25.95 ; J13.4@9.19,24.09 4.89,24.09 3.03,25.95 ; J13.6@9.19,31.71 4.47,31.71 3.03,33.15 ; J15.2@9.22,41.83 4.62,41.83 3.03,43.42 ; J15.4@9.22,49.45 4.46,49.45 3.03,50.88 ; J15.6@9.22,57.07 4.72,57.07 3.03,58.76 ; J12.2@9.24,67.2 4.81,67.2 3.03,68.98 ; J12.4@9.24,74.82 4.8,74.82 3.03,76.59 ; J12.6@9.24,82.44 4.43,82.44 3.03,83.84 ; PS1.5@24.716,108.87 24.716,111.484 23.31,112.89 4.23,112.89 3.03,111.69 3.03,83.84 ; 3.03,25.95 3.03,33.15 ; 3.03,33.15 3.03,43.42 ; 3.03,43.42 3.03,50.88 ; 3.03,50.88 3.03,58.76 ; 3.03,58.76 3.03,68.98 ; 3.03,68.98 3.03,76.59 ; 3.03,76.59 3.03,83.84
DI_VCC: C59.2 C60.2 PS1.7 R40.1 R42.2 R48.1 R50.2 R57.1 R58.2 R61.1 R62.1 R64.2 R69.1 R70.2 R71.1 R76.1 R77.2 R79.1 | length 160
  Top Layer w0.254: R64.2@15.024,53.845 R64.2@15.472,54.293 ; R57.1@17.04,14.04 R57.1@17.16,13.92
  Top Layer w0.5: C59.2@12.493,113.869 12.493,113.619 13.37,112.742 13.37,111.84 C60.2@13.77,111.44 13.77,109.49 14.39,108.87 PS1.7@19.636,108.87 ; v2(14.8,32.395) 16.655,32.395 17.045,32.005 R40.1@17.045,30.01 16.977,29.942 14.887,29.942 R42.2@14.82,29.875 ; v2(14.8,48.4) 16.53,48.4 17.193,47.737 R69.1@17.193,46.113 ; v2(14.8,73.91) 16.247,73.91 16.54,74.203 R61.1@16.54,76.64 ; v2(14.81,40.33) 14.84,40.33 14.943,40.227 16.9,40.227 17.193,39.934 17.193,38.197 17.091,38.095 15.138,38.095 R77.2@15.064,38.021 ; v2(14.81,57.72) 15.219,57.311 17.153,57.311 ; v2(14.85,24.29) 16.51,24.29 17.139,23.661 R48.1@17.139,22.1 17.139,22.04 16.814,21.715 R50.2@15.01,21.715 ; v2(14.85,66.04) 15.89,66.04 16.54,66.69 R71.1@16.54,68.54 16.54,68.44 16.215,68.115 R71.1@16.165,68.115 ; R58.2@15.02,13.892 14.938,13.892 R58.2@14.91,13.865 R58.2@15.02,13.975 ; R64.2@15.024,53.845 15.337,54.158 16.978,54.158 17.153,54.333 R62.1@17.153,54.47 17.153,57.311 ; R70.2@15.064,45.895 R69.1@17.193,45.895 ; v2(15.13,16.06) 15.02,15.95 R58.2@15.02,13.975 ; R79.1@16.54,60.44 16.54,57.924 17.153,57.311 ; R57.1@17.16,13.92 17.133,13.892 15.102,13.892 R58.2@15.02,13.975
  Bottom Layer w0.5: v2@14.59,73.7 v2(14.8,73.91) ; v2@14.69,24.45 v2(14.85,24.29)
  Bottom Layer w1.5: v2(15.13,16.06) 14.8,16.39 v2(14.8,32.395) v2(14.8,48.4) 14.8,57.64 14.72,57.72 14.72,107.52 16.07,108.87 PS1.7@19.636,108.87
DO1: R68.1 U1.95 | length 45.9
  Top Layer w0.254: R68.1@41.645,77.16 42.69,77.16 43.265,77.735 43.265,94.347 43.414,94.496 60.4,94.496 60.68,94.776 68.93,94.776 U1.95@70.023,93.683
DO2: R78.1 U1.96 | length 53
  Top Layer w0.254: R78.1@41.659,69.155 43.285,69.155 43.782,69.652 43.782,93.771 44.053,94.042 60.588,94.042 60.868,94.322 68.706,94.322 69.67,93.359 U1.96@69.67,93.33
DO3: R82.1 U1.97 | length 59.8
  Top Layer w0.254: R82.1@41.865,61.43 44.121,61.43 44.426,61.735 44.426,93.439 44.575,93.588 60.776,93.588 61.056,93.868 68.424,93.868 U1.97@69.316,92.976
GND: C1.2 C2.2 C3.2 C4.2 C7.1 C8.1 C9.1 C10.1 C11.1 C12.1 C13.2 C14.2 C15.1 C16.1 C17.1 C19.1 C20.1 C22.1 C23.1 C25.1 C26.2 C28.1 C29.1 C31.2 C32.1 C34.1 C35.1 C37.1 C38.1 C39.1 C40.1 C41.1 C42.1 C43.1 C44.1 C45.1 C46.1 C47.1 C48.1 C49.1 C50.2 C53.1 C54.2 C55.2 C56.1 C57.1 C58.1 C61.1 C62.2 C63.2 C64.1 C65.1 C66.1 C67.2 C68.2 C69.1 C70.1 C71.1 C72.1 C73.1 D3.3 D4.3 D5.C D7.3 D8.C D9.3 D10.3 D11.3 D12.3 D14.3 D16.3 D20.3 D22.3 D26.3 D28.3 D33.3 D37.3 D42.3 D57.2 D58.A D59.C D60.A D61.A D62.C D64.2 D65.2 D66.A J1.2 J1.8 J3.3 J4.6 J5.N J6.3 J6.6 J7.3 J7.6 J8.3 J9.3 J9.6 J10.6 J10.12 J10.13 J10.14 J18.2 J19.5 J19.SH1 J19.SH2 J19.SH3 J19.SH4 J20.4 J20.SH1 J20.SH2 J20.SH3 J20.SH4 PS1.2 Q1.2 Q2.2 Q3.2 Q4.2 Q5.2 Q6.2 Q7.2 Q8.2 Q9.2 R2.2 R16.2 R30.1 R95.2 R98.2 RV1.1 S1.4_1 S1.4_2 S1.4_3 S1.4_4 U1.10 U1.20 U1.27 U1.49 U1.74 U1.99 U2.1 U3.15 U4.7 U5.5 U6.15 U7.15 U8.7 U8.8 U9.4 U10.2 U10.3 U10.4 U10.7 U11.4 U12.3 U12.9 U12.14 U12.16 U12.19 U12.29 U12.48 U13.3 U13.5 U13.6 U14.3 U14.5 U14.6 U15.2 VR1.1 | length 1807.4
  Top Layer w0.254: C67.2@49.757,195.77 C67.2@49.784,195.797 ; S1.4_1@52.28,112.631 52.28,117.086 52.884,117.69 55.843,117.69 56.333,118.18 ; 53.94,75.55 57.16,78.77 60.07,78.77 60.086,78.754 63.933,78.754 U1.10@71.437,86.259 ; C12.1@61.118,91.89 62.189,92.96 67.917,92.96 U1.99@68.609,92.269 ; C9.1@70.369,78.089 70.452,78.089 71.03,77.511 71.24,77.511 73.18,79.451 73.18,80.93 U1.20@74.973,82.723 ; U1.27@79.569,81.309 80.51,80.368 80.51,77.54 82.625,75.425 82.835,75.425 83.535,76.125 C8.1@83.536,76.674 ; U1.74@79.569,100.047 80.4,100.878 80.4,103.29 82.34,105.23 ; 83.791,41.754 83.791,41.219 87.8,37.21 87.8,27.767 89.611,25.956 89.611,25.928 90.135,25.404 U12.29@90.135,25.386 ; C40.1@84.019,41.982 84.388,42.35 C40.1@84.389,42.351 ; U1.49@87.347,89.087 89.197,87.237 90.483,87.237 92.03,85.69 ; U10.2@87.516,152.58 U10.7@92.254,152.58 ; C13.2@91.106,84.824 90.823,84.542 90.823,84.483 92.03,85.69 ; U12.48@91.549,17 93.139,18.59 93.395,18.59 U12.3@94.278,17.707 96.692,15.293 96.692,10.688 99.85,7.53 100.601,7.53 C41.1@101.366,8.294 ; C10.1@92.85,86.51 92.03,85.69 ; U12.19@95.339,25.032 97.809,27.503 100.093,27.503 103.81,31.22 104.002,31.22 C46.1@104.749,30.473 ; U12.9@96.4,19.828 104.539,11.689 104.417,11.567 C44.1@103.754,10.904 ; U12.16@96.4,23.972 98.397,25.969 102.069,25.969 105.661,29.561 ; U12.14@97.107,23.265 98.812,24.97 103.55,24.97 104.01,24.51 104.33,24.51 104.65,24.19 v1(107.64,24.19) ; C44.1@103.736,10.904 C44.1@103.754,10.904 ; C44.1@104.126,10.904 C44.1@103.754,10.904 ; v1(140.32,187.27) 140.95,187.27 ; 141.28,189.98 140.95,189.65 140.95,187.27 ; J19.5@145.232,184.06 141.67,184.06 141.34,184.39 141.34,187.03 141.025,187.345 140.95,187.27
  Top Layer w0.5: D20.3@30.739,92.54 37.01,92.54 v1(37.3,92.25) ; v1(37.19,111.58) C58.1@39.665,111.579 39.713,111.532 39.713,109.197 C57.1@39.76,109.15 ; v1(37.24,131.224) 37.631,131.224 38.431,130.424 Q7.2@38.481,130.424 ; v2@37.82,84.53 39.55,84.53 41.5,82.58 Q1.2@41.5,80.95 ; v1(38.21,148.95) 38.788,148.372 Q5.2@38.788,146.939 ; v2(39.2,73.9) 39.201,73.899 40.6,73.899 41.614,72.884 Q2.2@41.664,72.884 41.689,72.86 42.697,72.86 42.99,73.153 42.99,74.281 v1(43.099,74.39) ; v2(39.23,66.29) 39.311,66.29 39.438,66.417 40.443,66.417 41.3,65.56 Q3.2@41.35,65.56 ; v1(44.87,158.6) 44.94,158.53 46.08,158.53 46.49,158.12 Q8.2@46.49,156.859 ; v1(48.199,74.226) 48.199,74.129 48.711,73.616 52.764,73.616 v1(53.5,72.88) ; C3.2@51.504,77.819 51.504,77.722 54.564,74.662 C7.1@54.564,74.564 53.5,73.5 v1(53.5,72.88) ; S1.4_2@52.28,110.431 S1.4_1@52.28,112.631 ; C16.1@55.1,64.63 58.676,68.205 59.445,68.205 ; C16.1@55.15,64.53 55.15,63.39 C15.1@56.14,62.4 ; J10.6@55.75,18.27 55.75,26.8 57.97,29.02 J5.N@57.97,29.22 ; v1(57.17,91.66) 57.206,91.696 60.993,91.696 C12.1@61.029,91.731 ; J3.3@58.29,124.41 58.247,124.367 56.54,124.367 56.04,123.867 56.04,118.473 56.333,118.18 59.28,118.18 59.86,117.6 R2.2@59.86,116.42 59.87,116.41 59.87,112.641 S1.4_4@59.88,112.631 S1.4_3@59.88,110.431 ; C2.2@60.889,70.541 60.874,70.541 58.985,72.43 C1.2@58.97,72.43 57.375,70.835 57.375,70.275 ; U2.1@66.32,164.82 66.32,157.68 66.63,157.37 ; v1(67.27,64.38) 63.27,64.38 59.48,68.17 59.445,68.205 ; v1(69.29,67.67) 69.29,77.3 C9.1@70.264,78.274 ; 73.81,124.41 73.96,124.26 ; v1@73.96,122.46 v1(74.09,122.33) ; C70.1@80.025,135.83 79.92,135.935 79.92,136.88 80.48,137.44 85.68,137.44 86.335,138.095 86.335,141.683 86.335,142.242 89.732,142.242 90.33,142.84 90.33,146.615 91.76,148.045 C38.1@91.76,148.095 ; C11.1@81.589,106.162 81.664,106.162 83.144,104.683 C14.2@83.144,104.592 ; C8.1@82.971,76.689 83.535,76.125 84.053,75.607 84.467,75.607 84.57,75.71 v1(84.65,75.71) ; C72.1@83.124,123.032 C72.1@83.139,123.046 ; C71.1@83.139,125.447 C71.1@83.153,125.461 ; C39.1@85.735,44.895 85.911,45.072 85.911,48.681 86.887,49.657 94.196,49.657 ; 87.125,157.38 90.179,157.38 90.55,157.009 90.6,157.009 91,156.609 C37.1@91,156.559 ; U11.4@87.125,158.436 87.14,158.421 87.14,157.37 66.63,157.37 ; U10.2@87.326,152.58 87.326,149.104 87.98,148.45 C38.1@91.76,148.45 ; U10.2@87.516,152.525 85.703,152.525 85.41,152.818 85.41,156.207 85.117,156.5 67.5,156.5 66.63,157.37 ; C10.1@92.85,86.51 92.885,86.545 v1@94.89,86.545 ; v1(94.89,86.57) 97.21,88.89 v1(99.4,88.89) ; C47.1@95.935,35.485 96.111,35.308 99.023,35.308 C55.2@99.464,34.867 ; J1.2@96.52,49.657 94.196,49.657 ; J1.8@96.52,57.277 94.407,57.277 93.79,56.66 93.79,50.063 94.196,49.657 ; C55.2@99.464,34.786 C55.2@99.464,34.867 ; C55.2@100.111,34.786 99.545,34.786 C55.2@99.464,34.867 ; v1(100.26,35.98) 99.464,35.184 C55.2@99.464,34.867 ; 100.274,34.948 101.509,33.713 103.067,32.155 103.906,31.316 104.352,30.87 105.146,30.076 105.661,29.561 105.805,29.417 ; C41.1@101.366,8.294 101.366,8.296 v1(102.14,9.07) ; C44.1@104.126,10.904 v1(104.602,11.381) C43.1@107.196,13.974 108.43,15.209 v1(108.43,15.27) ; C31.2@105.16,114.69 105.56,115.09 105.56,116.07 v2(105.75,116.26) ; U15.2@105.429,163.83 106.527,163.83 106.82,163.537 v1(106.82,163.53) ; 105.934,29.288 106.561,28.661 C45.1@106.651,28.661 107.61,27.703 v1(107.61,27.41) ; U4.7@107.782,93.367 107.198,93.367 107.181,93.35 107.181,92.671 106.879,92.369 D8.C@106.879,90.93 106.879,88.773 v1(107.026,88.626) 107.172,88.48 127.45,88.48 128.31,89.34 v2@128.31,93.463 ; U8.8@108.8,125.68 U8.7@108.8,124.41 108.85,124.46 110.15,124.46 110.57,124.88 v2(110.66,124.88) ; v1(111.6,159.02) 112.6,159.02 Q9.2@112.61,159.03 ; D5.C@111.68,105.36 111.68,108.15 112.183,108.653 112.597,108.653 112.7,108.756 113.114,108.756 113.16,108.71 124.45,108.71 ; U3.15@113.33,76.089 114.747,76.089 115.04,75.796 115.04,74.573 114.717,74.25 114.717,72.627 C17.1@114.69,72.6 ; U7.15@114.31,118.25 116.037,118.25 116.33,117.957 116.33,116.644 115.856,116.17 115.856,114.806 C32.1@115.77,114.72 117.01,114.72 117.94,113.79 129.4,113.79 130.54,114.93 D12.3@130.67,114.93 ; U6.15@114.385,142.265 115.927,142.265 116.22,141.972 116.22,140.666 115.844,140.29 115.844,138.934 C25.1@115.75,138.84 ; v1(114.86,30.31) 114.96,30.21 C56.1@116.245,30.21 ; v1(115.57,16.61) 115.65,16.61 115.723,16.683 C50.2@117.089,16.683 ; v1(115.62,23.48) 116.749,23.48 C53.1@116.85,23.379 ; C25.1@115.75,138.79 116.15,138.39 117.14,138.39 117.6,137.93 126.94,137.93 127.4,138.39 127.4,140.821 ; U5.5@124.075,96.111 127.009,96.111 128.31,94.81 v2@128.31,93.463 ; C35.1@124.91,123.79 124.91,123.74 125.31,123.34 125.553,123.34 125.603,123.29 126.82,123.29 127.353,122.757 127.353,121.957 v2(127.41,121.9) ; C34.1@124.934,118.933 125.001,119 126.551,119 126.721,119.17 130.127,119.17 130.42,118.877 130.42,115.18 D12.3@130.67,114.93 ; C29.1@125.23,147.88 126.59,147.88 127.433,147.037 127.433,146.547 v2(127.49,146.49) 127.433,146.433 127.433,145.873 127.4,145.84 127.4,143.253 ; C28.1@125.243,143.191 125.474,142.96 127.107,142.96 127.4,143.253 ; 126.897,119.24 127.69,120.033 127.69,121.539 127.41,121.819 v2(127.41,121.9) ; v2@127.516,146.49 136.318,146.49 136.678,146.13 J7.3@141.18,146.13 ; v2(128.23,151.55) 128.66,151.98 129.89,151.98 D7.3@130.11,152.2 ; v2(128.5,126.16) 128.69,126.35 D11.3@130.44,126.35 ; v2(129.93,98.16) 129.97,98.2 131.44,98.2 D9.3@131.69,98.45 ; D12.3@130.74,114.93 D12.3@130.67,114.93 ; D10.3@130.99,141.33 127.909,141.33 127.4,140.821 ; D66.A@135.49,160.575 135.49,160.885 136.435,161.83 C73.1@138.33,161.83 144.11,161.83 144.34,161.6 ; v1(136.268,180.83) 136.286,180.848 D65.2@137.434,180.848 ; D64.2@139.103,187.452 140.138,187.452 v1(140.32,187.27) ; J8.3@141.13,95.04 139.26,93.17 128.603,93.17 v2(128.456,93.316) v2@128.31,93.463 ; J9.3@141.16,120.58 137.03,120.58 135.71,121.9 v2(127.41,121.9) ; v1(53.5,72.88) 55.909,70.471 57.179,70.471 57.375,70.275 ; 57.375,70.275 59.445,68.205 ; 127.4,140.821 127.4,143.253
  Top Layer w1: D28.3@30.739,11.62 30.816,11.543 32.627,11.543 33.28,10.89 v2(33.52,10.89) ; D22.3@30.739,19.71 32.82,19.71 v2(33.4,19.13) ; D16.3@30.739,27.8 32.73,27.8 v2(33.22,27.31) ; D42.3@30.739,35.9 31.198,35.9 32.268,34.83 33.16,34.83 v2(33.4,35.07) ; D37.3@30.739,43.99 30.816,43.913 32.677,43.913 v2(33.22,43.37) ; D33.3@30.739,52.08 32.814,52.08 33.4,51.494 v2(33.4,51.49) ; D14.3@30.739,84.45 37.6,84.45 v2(37.75,84.6) v2@37.82,84.53 ; D26.3@30.739,100.63 35.56,100.63 36.44,99.75 v2(37.02,99.75) ; v2(44.79,179.61) 45.56,178.84 Q4.2@45.56,177.1 ; v2(45.27,168.72) 45.74,168.72 46.5,167.96 Q6.2@46.5,167.06 ; J5.N@57.97,29.22 66.73,29.22 71.018,29.22 v1(71.539,29.741) ; J3.3@58.29,124.41 73.81,124.41 ; D61.A@58.71,171.855 62.725,171.855 63.15,172.28 ; R98.2@64.62,173.65 64.52,173.65 63.15,172.28 ; U14.5@66.265,180.789 66.265,187.989 U14.6@62.865,191.389 U14.3@62.865,180.789 62.865,172.565 63.15,172.28 ; v1@73.96,122.46 73.96,124.26 73.96,134.29 75.5,135.83 C70.1@80.025,135.83 ; C48.1@77.13,35.4 79.2,37.47 v1(79.51,37.47) 79.51,37.93 80.844,39.264 C49.1@80.844,39.476 83.719,42.35 84.388,42.35 84.389,42.35 C40.1@84.424,42.386 ; C11.1@81.589,106.162 83.124,107.697 C72.1@83.124,123.032 ; VR1.1@82.468,128.225 82.493,128.2 82.99,128.2 82.99,126.242 83.128,126.104 83.128,125.486 C71.1@83.153,125.461 ; C72.1@83.139,123.046 C71.1@83.139,125.447 ; C40.1@84.389,42.988 84.389,43.903 C39.1@85.558,45.072 ; D58.A@102.997,171.738 106.478,171.738 107.95,173.21 ; U13.6@108.761,192.718 112.161,189.318 112.161,185.284 ; R95.2@109.876,172.955 108.205,172.955 107.95,173.21 ; D5.C@111.68,105.185 111.84,105.025 C22.1@111.84,103.13 ; U13.5@112.161,182.118 112.161,185.284 ; C17.1@114.69,72.6 114.74,72.6 115.61,71.73 126.954,71.73 127.54,72.316 127.54,75.116 ; C23.1@123.93,102.11 123.935,102.115 123.935,106.514 124.09,106.669 124.09,108.35 124.45,108.71 124.81,109.07 141.08,109.07 J9.6@141.16,109.15 141.399,108.911 143.719,108.911 144.34,108.29 ; C20.1@124.66,82.14 124.66,82.09 124.81,81.94 126.37,81.94 v2(127.18,81.13) ; C19.1@124.667,77.086 126.634,77.086 127.18,76.54 ; v2(127.86,84.83) 128.24,84.45 D3.3@129.43,84.45 ; D4.3@129.91,74.93 128.71,74.93 128.67,74.89 127.766,74.89 127.54,75.116 ; J20.SH1@137.922,169.854 143.316,169.854 144.34,168.83 144.34,161.6 144.34,145.49 ; J8.3@141.13,95.04 143.84,95.04 ; J9.3@141.16,120.58 141.245,120.495 143.785,120.495 144.34,119.94 ; J7.6@141.18,134.7 141.419,134.461 144.039,134.461 144.34,134.16 ; J7.3@141.18,146.13 141.419,145.891 143.939,145.891 144.34,145.49 ; J6.6@141.2,69.44 143.794,69.44 144.38,70.026 144.38,80.28 ; 107.95,173.21 107.95,176.31 108.761,177.121 U13.3@108.761,182.118 108.761,184.881 109.75,185.87 111.575,185.87 112.161,185.284 ; 127.18,76.54 v2(127.18,81.13) ; 127.18,76.54 127.18,75.476 127.54,75.116 ; v2(127.18,81.13) 127.44,80.87 J6.3@141.2,80.87 141.204,80.866 143.794,80.866 144.38,80.28 ; 144.34,108.29 144.34,94.54 144.38,94.5 144.38,80.28 ; 144.34,108.29 144.34,119.94 ; 144.34,119.94 144.34,134.16 ; 144.34,134.16 144.34,145.49
  Top Layer w1.2: v2(41.06,8.36) 42.535,8.36 J10.13@45.275,5.62 ; v1(43.84,195.77) C67.2@49.757,195.77 ; J10.14@45.375,16.12 45.325,16.07 J10.13@45.325,5.46 ; C16.1@55.1,64.63 C16.1@55.1,64.58 C16.1@55.15,64.53 ; C66.1@55.72,189.56 55.72,195.777 55.74,195.797 ; C15.1@56.14,62.15 C15.1@56.14,62.4 ; 66.73,29.22 66.73,5.823 66.027,5.12 J10.12@60.225,5.12 60.225,5.41 60.075,5.56 45.425,5.56 J10.13@45.325,5.46 ; 69.89,194.57 69.93,194.53 C69.1@69.93,189.56 ; D62.C@85.97,193.69 85.97,195.99 85.98,196 ; 100.16,194.91 100.59,194.48 C61.1@100.59,190.9 ; C64.1@115.75,191.18 115.75,195.51 116.09,195.85 ; 143.316,169.854 146.296,169.854 146.385,169.765 147.379,169.765 148.082,170.468 J19.SH1@148.082,179.01 ; J10.13@45.325,5.46 45.275,5.41 J10.13@45.275,5.12 45.325,5.17 J10.13@45.325,5.46
  Top Layer w1.8: C63.2@121.63,195.37 133.79,195.37 136.24,192.92 136.24,191.06 137.32,189.98 141.28,189.98 146.166,189.98 148.032,188.114 148.032,186.56 J19.SH4@148.082,186.51 J19.SH3@148.082,183.91 J19.SH2@148.082,181.61 J19.SH1@148.082,179.01
  Top Layer w2: J18.2@5.588,180.721 20.221,180.721 24.472,184.972 RV1.1@30.226,184.972 ; J10.13@45.275,5.41 J10.13@45.275,5.62 ; C67.2@49.784,195.797 55.74,195.797 57.407,195.797 61.815,191.389 U14.6@62.865,191.389 66.046,194.57 69.89,194.57 C68.2@75.89,194.57 75.89,195.695 76.04,195.845 77.165,195.845 77.32,196 D60.A@82.99,196 85.98,196 93.42,196 C62.2@94.51,194.91 100.16,194.91 106.569,194.91 U13.6@108.761,192.718 111.893,195.85 116.09,195.85 121.48,195.85 121.63,195.7 C63.2@121.63,195.37
  Bottom Layer w0.5: 37.24,130.974 37.264,130.95 ; v1(43.099,74.39) 47.92,74.39 48,74.31 v1@48.097,74.31 ; v1(53.5,72.88) 53.46,72.92 53.46,91.03 54.09,91.66 v1(57.17,91.66) ; v1(67.27,64.38) 67.36,64.38 67.41,64.43 68.81,64.43 69.29,64.91 v1(69.29,67.67) ; v1@74.09,122.273 v1(74.09,122.33) ; 79.268,37.47 v1(79.51,37.47) ; v1(84.65,75.71) 94.89,85.95 v1(94.89,86.57) ; J1.2@96.52,49.657 96.271,49.408 96.271,48.056 96.26,48.045 96.26,47.533 96.553,47.24 99.63,47.24 100.26,46.61 v1(100.26,35.98) ; v1(99.4,88.89) 106.762,88.89 v1(107.026,88.626) ; v1(102.14,9.07) 104.451,11.381 v1(104.602,11.381) ; v2(105.75,116.26) 111.917,116.26 112.21,116.553 112.21,124.85 112.18,124.88 ; v1(107.61,27.41) 107.61,16.09 v1(108.43,15.27) 109.77,16.61 v1(115.57,16.61) 115.57,23.43 v1(115.62,23.48) 115.62,29.22 114.86,29.98 v1(114.86,30.31) ; v1(107.87,172.9) 106.82,171.85 v1(106.82,163.53) 106.82,161.37 106.08,160.63 106.08,159.203 106.373,158.91 111.49,158.91 v1(111.6,159.02) ; v2(110.66,124.88) 112.18,124.88 ; v2(127.41,121.9) 127.41,125.07 ; v2(127.49,146.49) 127.49,148.601 127.4,148.691 127.4,150.72 v2(128.23,151.55) ; v2(128.456,93.316) 129.93,94.79 v2(129.93,98.16) ; v2(128.5,126.16) 127.41,125.07 ; J20.SH4@130.822,175.254 J20.SH2@137.922,175.254 138.246,175.254 139.66,173.84 139.66,171.592 J20.SH1@137.922,169.854 J20.SH3@130.822,169.854 131.097,170.129 131.097,172.369 131.282,172.554 J20.4@131.372,172.554 ; v1(136.268,180.83) 139.9,180.83 140.42,181.35 140.42,187.17 v1(140.32,187.27) ; 112.18,124.88 127.22,124.88 127.41,125.07